# EAGLE board Bubbler (EAGLE 6.4)
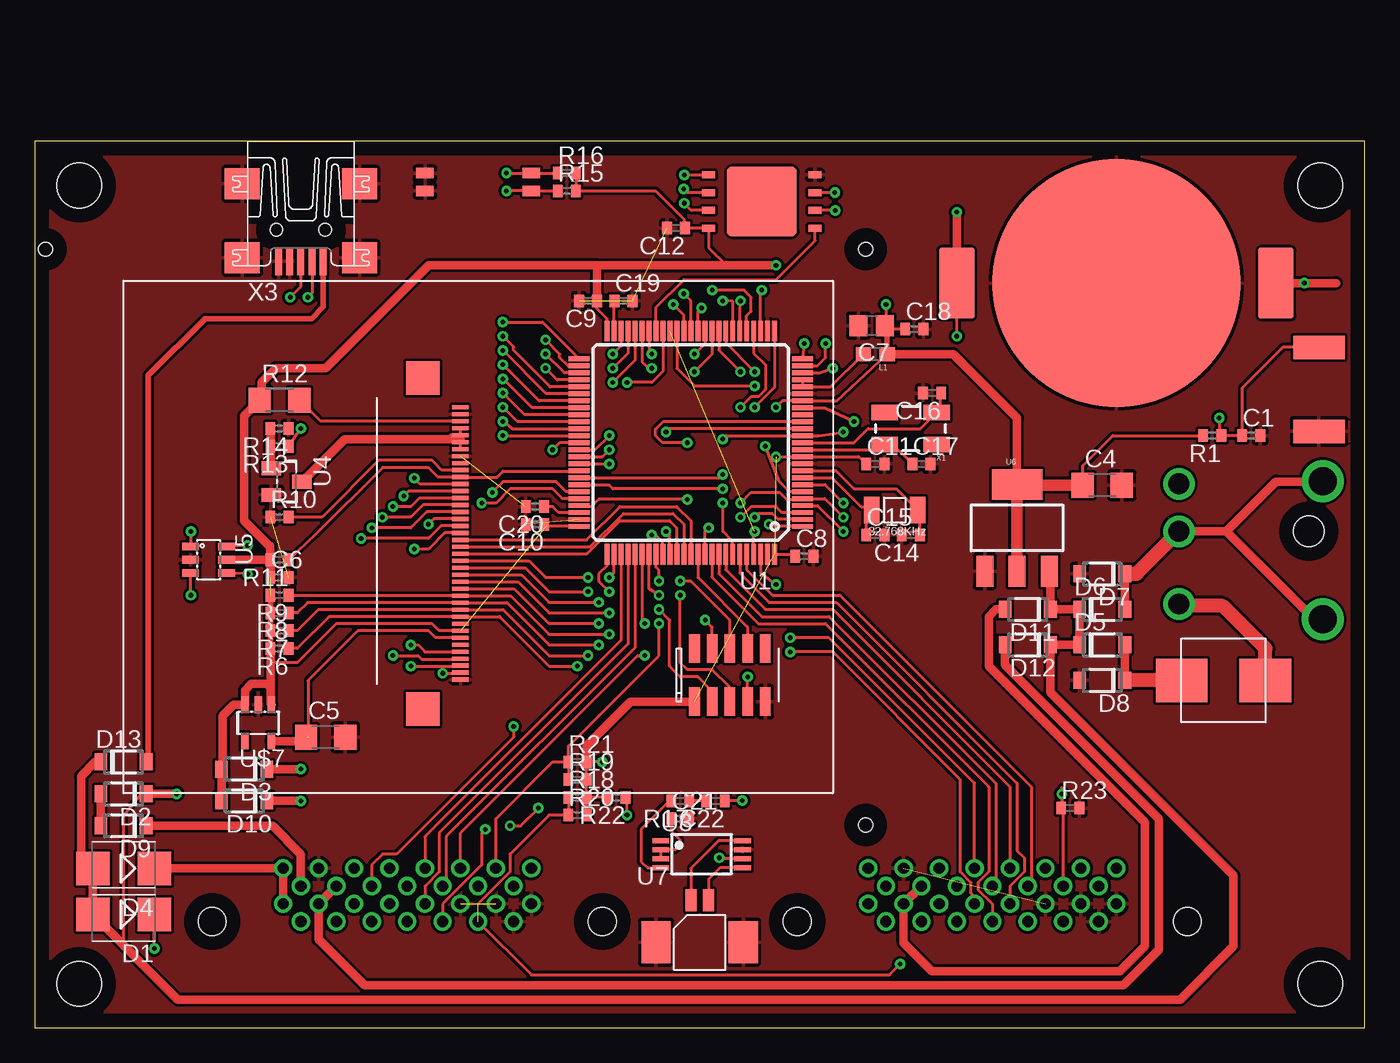
[diagram p0: board, top side]
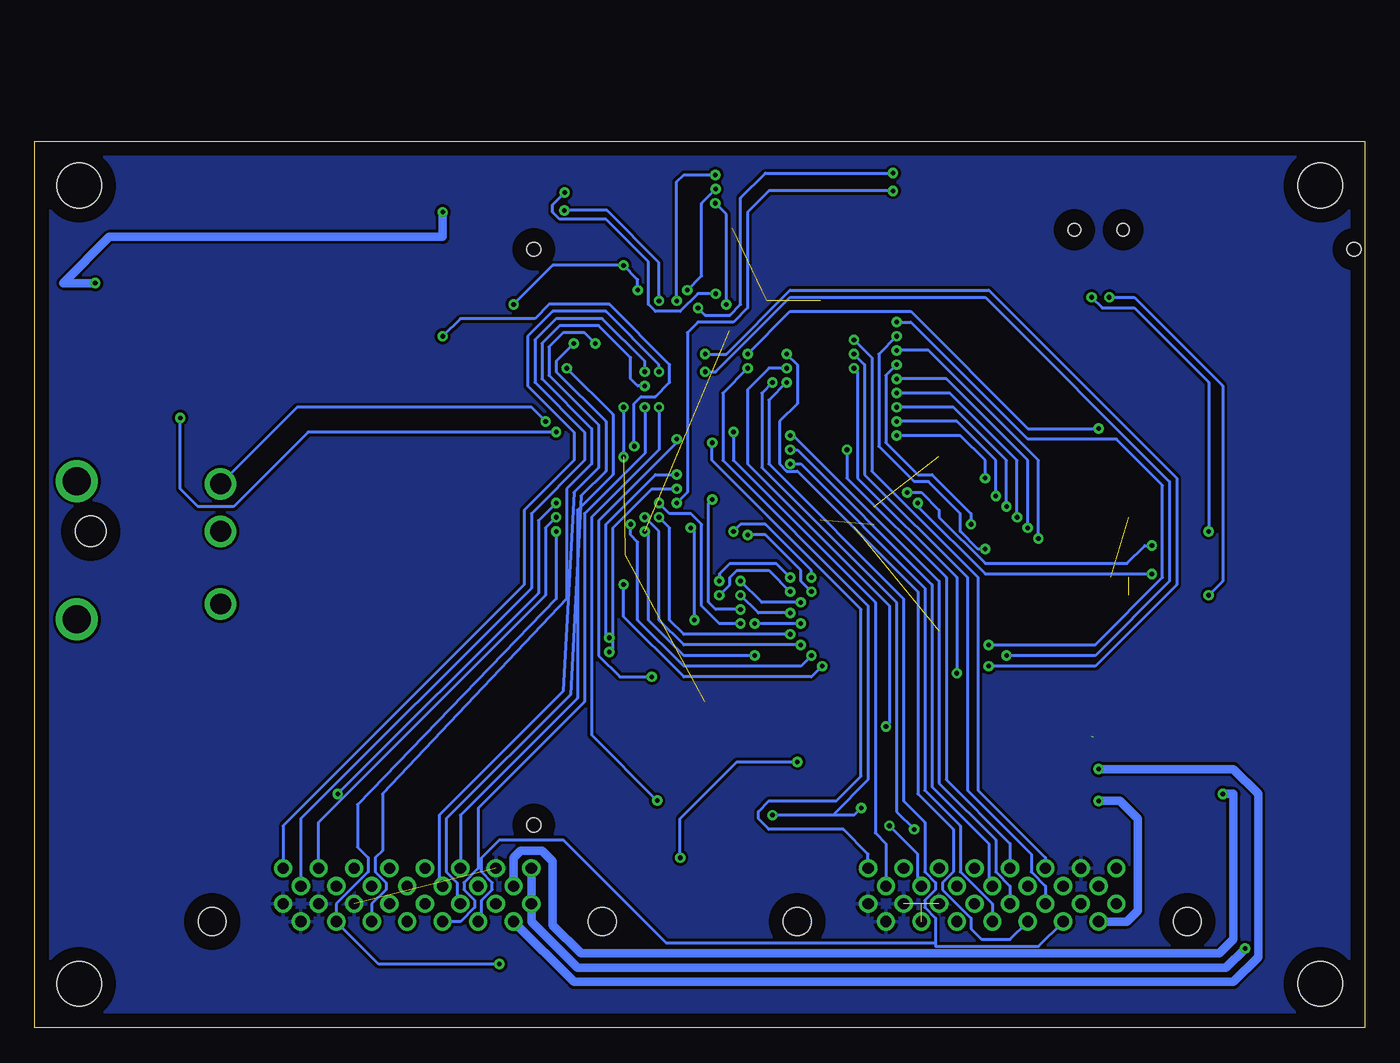
[diagram p1: board, bottom side, seen from below]

Size 95.25 x 63.5 mm. Coordinates in mm from the lower left corner, seen from the top.
Outline: 0,0 95.25,0 95.25,63.5 0,63.5 0,0
Copper layers (1*16): Top 0.035mm / dielectric 1.5mm / Bottom 0.035mm
Design rules "default": minimum track width 10mil, minimum drill 24mil, track to track 8mil, track to pad 8mil, pad to pad 8mil, via to via 8mil, smd to smd 8mil, copper to edge 40mil, drill to drill 8mil, minimum pad ring 10mil, minimum via ring 8mil, stop-mask expansion 4mil, vias tented up to drill 0mil, thermal gap 10mil
Holes 3.2 mm at 3.17,60.33 92.08,60.33 92.08,3.17 3.17,3.17

## Footprints (pad centres in the part's own frame; a part is rotated, then mirrored left to right if it is on the bottom)
BATTERY-LINX-HLD-001 = smd 2.54 x 5.08: P1 -11.43,0; P2 11.43,0 | smd 17.78 x 17.78: PAD 0,0
C0402 = smd 0.7 x 0.9: 1 -0.65,0; 2 0.65,0
C1206 = smd 1.6 x 1.8: 1 -1.4,0; 2 1.4,0
C0805 = smd 1.3 x 1.5: 1 -0.95,0; 2 0.95,0
CONNECTOR-JAE-TX24-30 = drill 0.8: P1 -8.89,3.81; P2 -8.89,1.27; P3 -7.62,2.54; P4 -7.62,0; P5 -6.35,3.81; P6 -6.35,1.27; P7 -5.08,2.54; P8 -5.08,0; P9 -3.81,3.81; P10 -3.81,1.27; P11 -2.54,2.54; P12 -2.54,0; P13 -1.27,3.81; P14 -1.27,1.27; P15 0,2.54; P16 0,0; P17 1.27,3.81; P18 1.27,1.27; P19 2.54,2.54; P20 2.54,0; P21 3.81,3.81; P22 3.81,1.27; P23 5.08,2.54; P24 5.08,0; P25 6.35,3.81; P26 6.35,1.27; P27 7.62,2.54; P28 7.62,0; P29 8.89,3.81; P30 8.89,1.27 | hole 2: -13.97,0; 13.97,0
SMB = smd 2.4 x 2.4: A 2.2,0; C -2.2,0
SOD123FL = smd 0.91 x 1.22: A 1.625,0; C -1.625,0
MF-SM030 = smd 3.7 x 3.1: P$1 0,0; P$2 6,0
0603 = smd 1.1 x 1: 1 -0.85,0; 2 0.85,0
R0402 = smd 0.7 x 0.9: 1 -0.65,0; 2 0.65,0
R1206 = smd 1.6 x 1.803: 1 -1.422,0; 2 1.422,0
SWITCH-DIP-GDH-02 = smd 0.762 x 1.27: P1 0,0; P2 1.27,0; P3 1.27,7.62; P4 0,7.62
ITT-KSS-G = smd 1.7 x 3.7: P$1 -3,2; P$2 3,2
TQFP100 = smd 1.5 x 0.35: 1 -8,6; 2 -8,5.5; 3 -8,5; 4 -8,4.5; 5 -8,4; 6 -8,3.5; 7 -8,3; 8 -8,2.5; 9 -8,2; 10 -8,1.5; 11 -8,1; 12 -8,0.5; 13 -8,0; 14 -8,-0.5; 15 -8,-1; 16 -8,-1.5; 17 -8,-2; 18 -8,-2.5; 19 -8,-3; 20 -8,-3.5; 21 -8,-4; 22 -8,-4.5; 23 -8,-5; 24 -8,-5.5; 25 -8,-6; 51 8,-6; 52 8,-5.5; 53 8,-5; 54 8,-4.5; 55 8,-4; 56 8,-3.5; 57 8,-3; 58 8,-2.5; 59 8,-2; 60 8,-1.5; 61 8,-1; 62 8,-0.5; 63 8,0; 64 8,0.5; 65 8,1; 66 8,1.5; 67 8,2; 68 8,2.5; 69 8,3; 70 8,3.5; 71 8,4; 72 8,4.5; 73 8,5; 74 8,5.5; 75 8,6 | smd 0.35 x 1.5: 26 -6,-8; 27 -5.5,-8; 28 -5,-8; 29 -4.5,-8; 30 -4,-8; 31 -3.5,-8; 32 -3,-8; 33 -2.5,-8; 34 -2,-8; 35 -1.5,-8; 36 -1,-8; 37 -0.5,-8; 38 0,-8; 39 0.5,-8; 40 1,-8; 41 1.5,-8; 42 2,-8; 43 2.5,-8; 44 3,-8; 45 3.5,-8; 46 4,-8; 47 4.5,-8; 48 5,-8; 49 5.5,-8; 50 6,-8; 76 6,8; 77 5.5,8; 78 5,8; 79 4.5,8; 80 4,8; 81 3.5,8; 82 3,8; 83 2.5,8; 84 2,8; 85 1.5,8; 86 1,8; 87 0.5,8; 88 0,8; 89 -0.5,8; 90 -1,8; 91 -1.5,8; 92 -2,8; 93 -2.5,8; 94 -3,8; 95 -3.5,8; 96 -4,8; 97 -4.5,8; 98 -5,8; 99 -5.5,8; 100 -6,8
SPANSION-WSON-8 = smd 0.5 x 1: P1 -1.905,-3.81; P2 -0.635,-3.81; P3 0.635,-3.81; P4 1.905,-3.81; P5 1.905,3.81; P6 0.635,3.81; P7 -0.635,3.81; P8 -1.905,3.81 | smd 5 x 5: P$9 0,0
TSSOP8 = smd 1.2 x 0.35: 1 -2.925,0.975; 2 -2.925,0.325; 3 -2.925,-0.325; 4 -2.925,-0.975; 5 2.925,-0.975; 6 2.925,-0.325; 7 2.925,0.325; 8 2.925,0.975
DUBLIB_SOT23 = smd 1 x 1.4: 1 -0.95,-1.1; 2 0.95,-1.1; 3 0,1.1
SOT23-6L = smd 0.55 x 1.2: 1 -0.95,-1.3; 2 0,-1.3; 3 0.95,-1.3; 4 0.95,1.3; 5 0,1.3; 6 -0.95,1.3
SOT223 = smd 1.219 x 2.235: 1 -2.311,-3.099; 2 0,-3.099; 3 2.311,-3.099 | smd 3.6 x 2.2: 4 0,3.099
MOLEX-1.25WTB-RA-CONN = smd 0.8 x 1.6: P$1 0,0; P$2 1.25,0 | smd 2.1 x 3: P$3 -2.5,-3; P$4 3.75,-3
STM32-JTAG-10P = smd 0.762 x 2.032: 1 0,0; 2 0,3.81; 3 1.27,0; 4 1.27,3.81; 5 2.54,0; 6 2.54,3.81; 7 3.81,0; 8 3.81,3.81; 9 5.08,0; 10 5.08,3.81
DCJACK_CUI_PJ012B = drill 2: GND1 3,6.3; GND2 3,-3.6 | drill 1.5: P1 13.3,5.2; P2 13.3,0; P3 13.3,-3.4 | hole 2.2: 4,0
NHD-2.4-240320SF-OUTLINE = hole 1: 0.75,59.51; 41.97,59.51; 0.75,0.75
SOT23-5L = smd 0.55 x 1.2: 1 -0.95,-1.3; 2 0,-1.3; 3 0.95,-1.3; 4 0.95,1.3; 5 -0.95,1.3
MOLEX-534132-060 = smd 0.3 x 1.2: P1 0,0; P2 0.5,0; P3 1,0; P4 1.5,0; P5 2,0; P6 2.5,0; P7 3,0; P8 3.5,0; P9 4,0; P10 4.5,0; P11 5,0; P12 5.5,0; P13 6,0; P14 6.5,0; P15 7,0; P16 7.5,0; P17 8,0; P18 8.5,0; P19 9,0; P20 9.5,0; P21 10,0; P22 10.5,0; P23 11,0; P24 11.5,0; P25 12,0; P26 12.5,0; P27 13,0; P28 13.5,0; P29 14,0; P30 14.5,0; P31 15,0; P32 15.5,0; P33 16,0; P34 16.5,0; P35 17,0; P36 17.5,0; P37 18,0; P38 18.5,0; P39 19,0; P40 19.5,0 | smd 2.4 x 2.4: P$42 -2.1,-2.7; P$43 21.6,-2.7
CRYSTAL-SMD-5X3 = smd 1.9 x 1.1: 1 -1.85,-1.15; 2 1.85,-1.15; 3 1.85,1.15; 4 -1.85,1.15
CM415 = smd 1.1 x 1.9: P$1 0,0; P$2 3.3,0
DUBLIB_UX60-MB-5ST = smd 2 x 0.5: 1 2.25,1.6; 2 2.25,0.8; 3 2.25,0; 4 2.25,-0.8; 5 2.25,-1.6 | smd 2.2 x 2.5: M1 -3.3,-4.2; M2 -3.3,4.2; M3 2,4.2; M4 2,-4.2 | hole 0.9: 0,-1.75; 0,1.75

## Placement (x,y rotation side)
B1  BATTERY-LINX-HLD-001  [BATTERY-LINX-HLD-001]  77.47,53.34 180 top
C1  220pF  [C0402]  87.12,42.42 0 top
C4  10uF  [C1206]  76.45,38.86 0 top
C5  10uF  [C1206]  20.83,20.83 0 top
C6  0.1uF  [C0402]  17.53,32.26 0 top
C7  10uF  [C0805]  59.94,50.29 180 top
C8  0.1uF  [C0402]  55.12,33.78 0 top
C9  0.1uF  [C0402]  39.62,52.07 180 top
C10  0.1uF  [C0402]  35.81,36.07 180 top
C11  0.1uF  [C0402]  60.2,40.39 0 top
C12  0.1uF  [C0402]  45.92,57.28 180 top
C14  18pF  [C0402]  62.74,35.31 180 top
C15  18pF  [C0402]  60.2,35.31 0 top
C16  18pF  [C0402]  64.26,45.47 180 top
C17  18pf  [C0402]  63.5,40.39 0 top
C18  0.1uF  [C0402]  62.99,50.04 0 top
C19  0.1uF  [C0402]  42.16,52.07 0 top
C20  0.1uF  [C0402]  35.81,37.34 180 top
C21  1uF  [C0402]  46.23,14.99 0 top
C22  0.39uF  [C0402]  48.77,16.26 180 top
CARD0  CONNECTOR-JAE-TX24-30F  [CONNECTOR-JAE-TX24-30]  68.58,7.62 0 top
CARD1  CONNECTOR-JAE-TX24-30F  [CONNECTOR-JAE-TX24-30]  26.67,7.62 0 top
D1  [SMB]  6.35,8.13 180 top
D2  SMF5.0AT1  [SOD123FL]  6.35,16.76 180 top
D3  SMF5.0AT1  [SOD123FL]  14.99,18.54 180 top
D4  [SMB]  6.35,11.43 180 top
D5  SMF5.0AT1  [SOD123FL]  76.45,27.43 0 top
D6  SMF5.0AT1  [SOD123FL]  76.45,29.97 0 top
D7  SMF5.0AT1  [SOD123FL]  76.45,32.51 180 top
D8  SMF5.0AT1  [SOD123FL]  76.45,24.89 180 top
D9  SMF5.0AT1  [SOD123FL]  6.35,14.48 180 top
D10  SMF5.0AT1  [SOD123FL]  14.99,16.26 180 top
D11  SMF5.0AT1  [SOD123FL]  71.12,29.97 180 top
D12  SMF5.0AT1  [SOD123FL]  71.12,27.43 180 top
D13  SMF5.0AT1  [SOD123FL]  6.35,19.05 0 top
F1  BOURNES-PTC-MF-SMXXXMF-SM030  [MF-SM030]  88.14,24.89 180 top
L1  [0603]  60.2,48.26 180 top
R1  47K  [R0402]  84.33,42.42 180 top
R6  10K  [R0402]  17.53,27.18 180 top
R7  10K  [R0402]  17.53,28.45 180 top
R8  10K  [R0402]  17.53,29.72 180 top
R9  10K  [R0402]  17.53,30.99 180 top
R10  47K  [R0402]  17.53,36.58 0 top
R11  47K  [R0402]  17.53,33.53 180 top
R12  330  [R1206]  17.53,44.96 0 top
R13  1K  [R0402]  17.53,41.66 180 top
R14  47K  [R0402]  17.53,42.93 180 top
R15  47K  [R0402]  38.1,59.94 0 top
R16  47K  [R0402]  38.1,61.21 0 top
R17  20K  [R0402]  46.23,16.26 180 top
R18  10K  [R0402]  38.86,16.51 0 top
R19  10K  [R0402]  38.86,17.78 0 top
R20  10K  [R0402]  38.86,15.24 0 top
R21  10K  [R0402]  38.86,19.05 0 top
R22  47K  [R0402]  41.66,16.51 180 top
R23  47K  [R0402]  74.17,15.75 0 top
SW1  SWITCH-DIP-GDH-02  [SWITCH-DIP-GDH-02]  35.56,59.94 90 top
SW2  ITT-SWITCH-KSS-G  [ITT-KSS-G]  93.98,45.72 90 top
U1  STM32F41X-100P  [TQFP100]  46.99,41.91 180 top
U2  SPANSION-S25FL256  [SPANSION-WSON-8]  52.07,59.18 90 top
U3  LM4890  [TSSOP8]  47.75,12.45 0 top
U4  BIPOLAR-PMBT6428  [DUBLIB_SOT23]  18.03,39.12 270 top
U5  USBLC6-2  [SOT23-6L]  12.45,33.53 270 top
U6  TLV1117  [SOT223]  70.36,35.81 0 top
U7  MOLEX-1.25-WTB-RA-CONN-2POS  [MOLEX-1.25WTB-RA-CONN]  46.99,9.14 0 top
U$1  STM32-JTAG-10P  [STM32-JTAG-10P]  47.24,23.37 0 top
U$2  DCJACK-CUI-PJ051AH  [DCJACK_CUI_PJ012B]  95.25,35.56 180 top
U$3  [NHD-2.4-240320SF-OUTLINE]  0,56.52 270 top
U$7  NCP500  [SOT23-5L]  16,21.84 180 top
U$10  NHD-2.4-240320SF  [MOLEX-534132-060]  30.48,44.45 270 top
X1  [CRYSTAL-SMD-5X3]  62.74,42.93 180 top
X2  CM415  [CM415]  63.25,37.08 180 top
X3  MINI-USBUX60-MB-5ST  [DUBLIB_UX60-MB-5ST]  19.05,57.15 270 top

## Library data of the parts
B1 CARD0 CARD1 F1 SW1 SW2 U1-U7 U$1-U$3 U$7 U$10 X2 X3 = Pygmy
C1 C4-C12 C14-C22 R1 R6-R23 = rcl
D1-D13 = diode
L1 = SparkFun-Passives
X1 = SparkFun-FreqCtrl

## Nets
2.8V: C5.1 U$7.5 U$10.P34
3.3V: C4.1 C6.1 C7.1 C8.1 C9.1 C10.1 C11.1 C12.1 C18.1 D3.A D10.A L1.1 R1.2 R6.2 R7.2 R8.2 R9.2 R11.2 R12.1 R15.2 R16.2 R18.2 R19.2 R20.2 R21.2 R22.2 U1.11 U1.19 U1.28 U1.50 U1.75 U1.100 U2.P8 U3.6 U5.5 U6.2 U6.4 U$1.1 U$7.1 U$7.3 U$10.P33
+5V: D2.A D9.A
AUDIO_OUT: C22.1 U1.29
AUDIO_SHUTDOWN: U3.1
BAT: B1.P1 B1.P2 U1.6
BOOT0: R15.1 SW1.P1 U1.94
BOOT1: R16.1 SW1.P2 U1.37
CARD0_INSERT: CARD0.P23 R23.1 U1.7
CARD1_INSERT: CARD1.P23 R22.1 U1.45
CARD_SCL: CARD0.P24 CARD1.P24 R18.1 R20.1 U1.4
CARD_SDA: CARD0.P25 CARD1.P25 R19.1 R21.1 U1.5
EXT0_0: CARD0.P9 U1.23
EXT0_1: CARD0.P10 U1.24
EXT0_2: CARD0.P11 U1.25
EXT0_3: CARD0.P12 U1.26
EXT0_4: CARD0.P13 U1.68
EXT0_5: CARD0.P14 U1.69
EXT0_6: CARD0.P15 U1.92
EXT0_7: CARD0.P16 U1.91
EXT0_8: CARD0.P17 U1.93
EXT0_9: CARD0.P18 U1.95
EXT0_10: CARD0.P19 U1.96
EXT0_11: CARD0.P20 U1.40
EXT0_12: CARD0.P21
EXT0_ADC0: CARD0.P27 U1.33
EXT0_ADC1: CARD0.P29 U1.34
EXT1_0: CARD1.P9 U1.52
EXT1_1: CARD1.P10 U1.53
EXT1_2: CARD1.P11 U1.47
EXT1_3: CARD1.P12 U1.48
EXT1_4: CARD1.P13 U1.63
EXT1_5: CARD1.P14 U1.64
EXT1_6: CARD1.P15 U1.65
EXT1_7: CARD1.P16 U1.66
EXT1_8: CARD1.P17 U1.78
EXT1_9: CARD1.P18 U1.79
EXT1_10: CARD1.P19 U1.80
EXT1_11: CARD1.P20 U1.42
EXT1_12: CARD1.P21 U1.41 U1.97
EXT1_ADC0: CARD1.P27 U1.15
EXT1_ADC1: CARD1.P29 U1.16
FLASH_CS: U1.43 U2.P1
FLASH_IO0: U1.32 U2.P5
FLASH_IO1: U1.31 U2.P2
FLASH_IO2: U1.38 U2.P3
FLASH_IO3: U1.39 U2.P7
FLASH_SCK: U1.30 U2.P6
GND: B1.PAD C1.2 C4.2 C5.2 C6.2 C7.2 C8.2 C9.2 C10.2 C11.2 C12.2 C14.2 C15.2 C16.2 C17.2 C18.2 C19.2 C20.2 C21.2 CARD0.P5 CARD0.P22 CARD0.P26 CARD0.P28 CARD0.P30 CARD1.P5 CARD1.P22 CARD1.P26 CARD1.P28 CARD1.P30 D7.A D8.A R10.1 R14.1 R23.2 SW1.P3 SW1.P4 SW2.P$1 U1.10 U1.20 U1.27 U1.74 U1.99 U2.P4 U3.7 U4.2 U5.2 U6.1 U7.P$3 U7.P$4 U$1.9 U$7.2 U$10.P2 U$10.P8 U$10.P40 X3.4 X3.5 X3.M1 X3.M2 X3.M3 X3.M4
JTCK: U1.76 U$1.5
JTDI: U1.77 U$1.6
JTDO: U1.89 U$1.8
JTMS: U1.72 U$1.3
LCD_BL: R13.1 U1.44
LCD_CS: R6.1 U1.98 U$10.P31
LCD_DB0: U1.81 U$10.P27
LCD_DB1: U1.82 U$10.P26
LCD_DB2: U1.83 U$10.P25
LCD_DB3: U1.84 U$10.P24
LCD_DB4: U1.85 U$10.P23
LCD_DB5: U1.86 U$10.P22
LCD_DB6: U1.87 U$10.P21
LCD_DB7: U1.88 U$10.P20
LCD_DB8: U1.55 U$10.P19
LCD_DB9: U1.56 U$10.P18
LCD_DB10: U1.57 U$10.P17
LCD_DB11: U1.58 U$10.P16
LCD_DB12: U1.59 U$10.P15
LCD_DB13: U1.60 U$10.P14
LCD_DB14: U1.61 U$10.P13
LCD_DB15: U1.62 U$10.P12
LCD_RD: R9.1 U1.3 U$10.P28
LCD_RESET: R11.1 U1.67 U$10.P11
LCD_RS: R7.1 U1.1 U$10.P30
LCD_WR: R8.1 U1.2 U$10.P29
LCD_X+: U1.36 U$10.P38
LCD_X-: U1.51 U$10.P36
LCD_Y+: U1.35 U$10.P37
LCD_Y-: U1.54 U$10.P39
N$1: CARD1.P4 D10.C
N$2: D6.A D7.C U$2.GND1 U$2.GND2 U$2.P2
N$3: F1.P$1 U$2.P1
N$4: R10.2 U$10.P10
N$5: U5.1 X3.2
N$6: U5.3 X3.3
N$7: D5.A D8.C F1.P$2
N$8: R12.2 U$10.P3
N$9: CARD0.P4 D3.C
N$10: U4.3 U$10.P4 U$10.P5 U$10.P6 U$10.P7
N$11: L1.2 U1.21 U1.22
N$12: C19.1 U1.49
N$13: R13.2 R14.2 U4.1
N$14: C20.1 U1.73
N$15: CARD0.P1 CARD0.P2 D1.C
N$16: U3.5 U7.P$2
N$17: U3.8 U7.P$1
N$18: C21.1 U3.2 U3.3
N$19: R17.2 U3.4
N$20: C22.2 R17.1
N$21: CARD1.P1 CARD1.P2 D4.C
N$22: CARD0.P3 D2.C
N$24: CARD0.P6 CARD0.P7 D11.A
N$25: CARD1.P3 D9.C
N$26: D13.A X3.1
N$28: CARD1.P6 CARD1.P7 D12.A
NJTRST: U1.90 U$1.4
NRST: C1.1 R1.1 SW2.P$2 U1.14 U$1.7
OSC32_IN: C15.1 U1.8 X2.P$2
OSC32_OUT: C14.1 U1.9 X2.P$1
OSC_IN: C17.1 U1.12 X1.3
OSC_OUT: C16.1 U1.13 X1.1
PWR_BAT: CARD0.P8 CARD1.P8 U1.46
PWR_CHG: U1.18 U$2.P3
USB_DM: U1.70 U5.6
USB_DP: U1.71 U5.4
VIN: D1.A D4.A D5.C D6.C D11.C D12.C D13.C U6.3

## Tracks (layer width: path | path; a pad name or v marks a point on that pad's centre or on a via)
2.8V  (1 unrouted)
  Top 0.203: U$10.P34 28.69,27.95 28.19,28.45 23.12,28.46 19.56,24.89 19.56,20.86
  Top 0.61: 19.24,20.89 C5.1 19.14,20.54 U$7.5
3.3V  (via drill 0.33)  (4 unrouted)
  Top 0.203: U$10.P33 28.95,28.45 28.45,28.96 21.59,28.96 18.8,26.16 16.88,26.16 | R16.2 R15.2 44.45,59.94 46.48,57.91 46.48,57.37 C12.1 U2.P8 48.26,55.88 49.53,54.61 | U1.50 40.99,50.78 40.28,51.49 40.28,52.06 C9.1 | 60.85,48.06 L1.1 57.44,44.91 U1.19 53.55,44.91 v53.09,44.45 | U1.75 36.62,35.91 C10.1 | R18.2 R19.2 R21.2 v40.64,19.05 | R20.2 R18.2 | R22.2 R18.2 | U3.6 49.09,12.12 v49.02,12.19 | C11.1 59.02,40.91 U1.11 54.97,40.89 v53.09,40.89 | U1.100 54.34,33.91 C8.1 | v60.96,51.82 60.96,50.36 C7.1 61.15,50.04 C18.1 | U1.28 51.99,52.75 v52.07,52.83 | C4.1 75.05,40.26 77.22,42.42 R1.2
  Top 0.406: R7.2 R6.2 R8.2 R9.2 | L1.1 61.05,50.14 C7.1
  Top 0.61: R6.2 16.88,26.16 16.88,24.38 | 16.88,24.38 16.88,23.22 U$7.1 | 16.88,24.38 16.62,24.64 15.49,24.64 15.05,24.2 U$7.3 14.25,23.14 13.46,22.35 13.46,18.64 D3.A D10.A | U5.5 R11.2 C6.1 16.87,34.53 16.77,34.53 14.99,36.32 14.99,43.84 R12.1 16.26,45.11 16.26,46.23 17.27,47.24 20.83,47.24 28.19,54.61 40.39,54.61 | U6.4 70.36,43.69 65.79,48.26 L1.1 | R21.2 39.51,20.21 42.67,23.37 U$1.1 | 40.28,52.06 40.28,54.51 40.39,54.61 | 40.39,54.61 49.53,54.61 v53.09,54.61
  Top 0.813: U6.2 U6.4 70.41,38.86 C4.1
  Bottom 0.203: v49.02,12.19 49.02,14.99 44.96,19.05 v40.64,19.05 | v60.96,51.82 58.17,54.61 v53.09,54.61 52.07,53.59 v52.07,52.83 | v53.09,44.45 v53.09,40.89
+5V
  Top 0.61: D9.A D2.A
AUDIO_OUT  (via drill 0.33)
  Top 0.203: U1.29 51.49,48.33 52.32,47.5 52.32,45.72 51.82,45.21 51.31,45.21 v50.55,44.45 | v50.67,16.28 49.4,16.27 C22.1
  Bottom 0.203: v50.55,44.45 50.55,41.4 55.37,36.58 55.37,20.98 v50.67,16.28
BAT  (via drill 0.33)
  Top 0.203: U1.6 54.05,38.41 53.34,39.12 v52.32,41.66 | v66.04,49.53 B1.P2
  Top 0.61: B1.P2 v66.04,58.42 | 93.22,53.34 v90.93,53.34 B1.P1
  Bottom 0.203: v52.32,41.66 52.32,44.7 51.82,45.21 50.8,45.21 49.78,46.23 49.78,47.5 54.1,51.82 58.42,51.82 59.44,50.8 64.77,50.8 v66.04,49.53
  Bottom 0.61: v66.04,58.42 66.04,56.64 89.92,56.64 93.22,53.34 v90.93,53.34
BOOT0  (via drill 0.33)
  Top 0.203: v33.78,59.94 SW1.P1 R15.1 | U1.94 49.99,34.85 49.28,35.56 v49.28,37.59
  Bottom 0.203: v33.78,59.94 42.67,59.94 44.2,58.42 44.2,51.56 45.21,50.55 47.75,50.55 48.51,49.78 48.51,38.35 v49.28,37.59
BOOT1  (via drill 0.33)
  Top 0.203: U1.37 47.49,51.3 v47.75,51.56 | v33.78,61.21 SW1.P2 R16.1
  Bottom 0.203: v47.75,51.56 47.24,51.05 45.47,51.05 44.7,51.82 44.7,59.44 42.93,61.21 v33.78,61.21
CARD0_INSERT  (via drill 0.33)
  Top 0.203: CARD0.P23 73.66,15.35 R23.1 | 73.56,17.22 v73.56,16.76 | v73.56,16.76 73.56,15.53 R23.1 | U1.7 56.59,38.91 v57.91,37.59 | v73.56,16.76 73.56,15.79 R23.1
  Bottom 0.203: v57.91,37.59 59.18,36.32 59.18,31.14 v73.56,16.76
CARD1_INSERT  (via drill 0.33)
  Top 0.203: U1.45 43.49,47.7 43.94,47.24 v44.2,47.24 | v42.42,15.24 42.42,16.4 R22.1 | v34.04,14.48 34.8,14.48 v36.07,15.75
  Bottom 0.203: v44.2,47.24 45.97,45.47 45.97,40.64 35.56,30.23 35.56,17.78 38.1,15.24 | 38.1,15.24 v42.42,15.24 | CARD1.P23 32,10.41 32,12.45 v34.04,14.48 | v36.07,15.75 36.58,15.24 38.1,15.24
CARD_SCL  (via drill 0.33)  (1 unrouted)
  Top 0.203: 31.75,8.89 34.04,11.18 34.04,12.45 36.83,15.24 R20.1 R18.1 | CARD1.P24 35.56,3.81 61.21,3.81 v61.98,4.57 | U1.4 56.06,37.41 v57.91,35.56
  Bottom 0.203: v61.98,4.57 70.61,4.57 CARD0.P24 73.66,8.89 71.37,11.18 71.37,12.19 72.14,12.95 72.14,16 57.91,30.73 v57.91,35.56
CARD_SDA  (via drill 0.33)
  Top 0.203: CARD1.P25 33.02,14.99 37.08,19.05 R21.1 | R21.1 R19.1 | R21.1 38.21,20.18 44.7,26.67 v44.7,28.96 | v50.55,37.59 51.31,38.35 53.34,38.35 53.85,37.85 54.93,37.85 U1.5 56.58,37.91 v57.91,36.58
  Bottom 0.203: CARD0.P25 74.93,14.73 58.67,30.99 58.67,35.81 v57.91,36.58 | v44.7,28.96 46.23,28.96 47.5,30.23 47.5,36.07 48.26,36.83 49.78,36.83 v50.55,37.59
EXT0_0  (via drill 0.33)
  Top 0.203: U1.23 56.21,46.91 v57.15,47.24
  Bottom 0.203: v57.15,47.24 53.85,43.94 53.85,39.62 56.39,37.08 56.39,23.62 64.77,15.24 CARD0.P9
EXT0_1  (via drill 0.33)
  Top 0.203: U1.24 56.05,47.41 56.64,48.01 v56.64,49.02
  Bottom 0.203: v56.64,49.02 57.91,47.75 57.91,46.99 54.36,43.43 54.36,39.88 56.13,38.1 56.9,23.88 65.79,14.99 65.79,11.18 65.02,10.41 65.02,9.14 CARD0.P10
EXT0_2  (via drill 0.33)
  Top 0.203: U1.25 55.02,47.91 v55.12,49.02
  Bottom 0.203: v55.12,49.02 55.88,49.78 57.4,49.78 58.42,48.77 58.42,46.74 54.86,43.18 54.86,40.13 56.64,38.35 57.4,24.13 66.29,15.24 66.29,10.41 CARD0.P11
EXT0_3  (via drill 0.33)
  Top 0.203: U1.26 52.99,45.88 v51.56,44.45
  Bottom 0.203: v51.56,44.45 51.56,41.15 55.88,36.83 55.88,23.37 63.5,15.75 63.5,11.43 64.52,10.41 64.52,9.91 63.75,9.14 63.75,8.64 64.77,7.62 CARD0.P12
EXT0_4  (via drill 0.33)
  Top 0.203: CARD0.P13 67.31,17.53 56.9,27.94 v54.1,27.94 | v49.28,39.62 49.02,39.37 39.03,39.37 U1.68
  Bottom 0.203: v54.1,27.94 54.36,28.19 54.36,36.07 50.8,39.62 v49.28,39.62
EXT0_5  (via drill 0.33)
  Top 0.203: CARD0.P14 67.31,9.4 67.06,9.65 67.06,10.41 66.29,11.18 66.29,17.78 57.15,26.92 v54.1,26.92 | v49.28,38.61 41.4,38.61 41.15,38.86 39.04,38.86 U1.69
  Bottom 0.203: v49.28,38.61 51.05,38.61 53.85,35.81 53.85,27.18 v54.1,26.92
EXT0_6
  Top 0.203: U1.92 48.99,32.54 52.07,29.46 56.9,29.46 68.83,17.53 68.83,10.41 CARD0.P15
EXT0_7
  Top 0.203: U1.91 48.49,32.28 51.82,28.96 56.64,28.96 68.33,17.27 68.33,11.18 67.56,10.41 67.56,9.91 68.58,8.89 CARD0.P16
EXT0_8
  Top 0.203: U1.93 49.49,32.81 52.32,29.97 57.15,29.97 69.85,17.27 CARD0.P17
EXT0_9
  Top 0.203: U1.95 50.49,32.57 52.58,30.48 57.4,30.48 70.36,17.53 70.36,12.7 70.87,12.19 70.87,11.18 69.85,10.16 CARD0.P18
EXT0_10
  Top 0.203: U1.96 50.99,32.83 52.83,30.99 57.66,30.99 71.37,17.27 71.37,10.41 CARD0.P19
EXT0_11  (via drill 0.33)
  Top 0.203: U1.40 45.99,47.23 47.24,45.97 v51.56,45.97
  Bottom 0.203: v51.56,45.97 52.07,45.97 52.58,46.48 52.58,48.01 54.86,50.29 57.66,50.29 58.93,49.02 58.93,46.48 55.37,42.93 55.37,40.39 57.15,38.61 57.15,30.73 70.36,16.76 70.36,12.7 70.87,12.19 70.87,11.18 70.1,10.41 70.1,9.91 71.12,8.89 CARD0.P20
EXT0_ADC0  (via drill 0.33)
  Top 0.203: U1.33 49.49,49.06 v51.56,46.99
  Bottom 0.203: v51.56,46.99 51.56,47.75 54.61,50.8 57.91,50.8 59.44,49.28 59.44,46.23 55.88,42.67 55.88,40.64 59.69,36.83 59.69,31.5 76.2,14.99 CARD0.P27
EXT0_ADC1  (via drill 0.33)
  Top 0.203: U1.34 48.99,48.55 v50.55,46.99
  Bottom 0.203: v50.55,46.99 50.55,47.5 54.36,51.31 58.17,51.31 59.94,49.53 59.94,45.97 56.64,42.67 56.64,40.64 60.2,37.08 60.2,31.75 77.47,14.48 CARD0.P29
EXT1_0  (via drill 0.33)
  Top 0.203: U1.52 38.19,47.41 37.59,48.01 37.59,48.26 v36.58,49.28
  Bottom 0.203: v36.58,49.28 35.31,48.01 35.31,39.88 27.69,32.26 27.69,17.02 22.86,12.19 CARD1.P9
EXT1_1  (via drill 0.33)
  Top 0.203: U1.53 37.93,46.91 v36.58,48.26
  Bottom 0.203: v36.58,48.26 35.81,47.5 35.81,39.62 28.45,32.26 28.45,17.02 23.88,12.45 23.88,11.18 22.86,10.16 CARD1.P10
EXT1_2  (via drill 0.33)
  Top 0.203: U1.47 42.49,48.33 v41.4,47.24 | v34.29,21.59 34.29,20.83 25.91,12.45 24.89,12.45 24.13,11.68 CARD1.P11
  Bottom 0.203: v41.4,47.24 42.67,47.24 44.2,45.72 44.2,40.39 34.04,30.23 34.04,21.84 v34.29,21.59
EXT1_3  (via drill 0.33)
  Top 0.203: U1.48 41.99,48.85 v41.4,48.26
  Bottom 0.203: v41.4,48.26 40.64,47.5 40.64,44.7 41.91,43.43 41.91,40.39 41.4,39.88 40.64,39.88 32,31.24 32,16.76 29.46,14.22 29.46,11.18 30.23,10.41 30.23,9.91 28.19,7.87 28.19,7.11 27.43,6.35 25.4,6.35 CARD1.P12
EXT1_4  (via drill 0.33)
  Top 0.203: U1.63 37.59,41.91 v37.08,41.4
  Bottom 0.203: v37.08,41.4 37.08,39.37 29.97,32.26 29.97,17.78 25.4,13.21 CARD1.P13
EXT1_5  (via drill 0.33)
  Top 0.203: U1.64 40.14,41.41 v41.15,42.42
  Bottom 0.203: v41.15,42.42 40.89,42.42 30.48,32 30.48,17.53 26.42,13.46 26.42,11.18 25.4,10.16 CARD1.P14
EXT1_6  (via drill 0.33)
  Top 0.203: U1.65 40.66,40.91 v41.15,41.4
  Bottom 0.203: v41.15,41.4 40.64,41.4 30.99,31.75 30.99,17.27 26.92,13.21 26.92,10.41 CARD1.P15
EXT1_7  (via drill 0.33)
  Top 0.203: U1.66 40.92,40.41 v41.15,40.39
  Bottom 0.203: v41.15,40.39 40.39,40.39 31.5,31.5 31.5,17.02 28.96,14.48 28.96,11.18 26.67,8.89 CARD1.P16
EXT1_8
  Top 0.203: U1.78 41.99,27.77 27.94,13.72 CARD1.P17
EXT1_9
  Top 0.203: U1.79 42.49,27.5 28.96,13.97 28.96,11.18 27.94,10.16 CARD1.P18
EXT1_10
  Top 0.203: U1.80 42.99,27.24 29.46,13.72 29.46,10.41 CARD1.P19
EXT1_11  (via drill 0.33)
  Top 0.203: v42.42,46.23 44.2,46.23 44.99,47.02 U1.42 | v32.26,14.22 32,13.97 32,11.68 29.21,8.89 CARD1.P20
  Bottom 0.203: v42.42,46.23 43.18,45.47 43.18,40.13 33.53,30.48 33.53,15.49 v32.26,14.22
EXT1_12  (via drill 0.33)  (1 unrouted)
  Top 0.203: CARD1.P21 30.48,13.97 43.18,26.67 v43.69,26.67 | U1.97 51.49,35.49 v51.56,35.56
  Bottom 0.203: v43.69,26.67 48.77,26.67 51.31,29.21 51.31,35.31 v51.56,35.56
EXT1_ADC0  (via drill 0.33)
  Top 0.203: U1.15 45.45,42.91 v45.21,42.67
  Bottom 0.203: v45.21,42.67 45.21,40.64 35.05,30.48 35.05,13.97 34.29,13.21 CARD1.P27
EXT1_ADC1  (via drill 0.33)
  Top 0.203: U1.16 44.98,43.41 44.45,42.88 44.45,42.42 44.96,41.91 v46.74,41.91
  Bottom 0.203: CARD1.P29 35.56,12.45 37.34,14.22 42.67,14.22 43.43,14.99 43.43,15.49 42.67,16.26 37.85,16.26 36.07,18.03 36.07,29.97 46.74,40.64 v46.74,41.91
FLASH_CS
  Top 0.203: U1.43 44.49,51.6 46.48,53.59 53.09,53.59 55.88,56.39 U2.P1
FLASH_IO0  (via drill 0.33)
  Top 0.203: U1.32 49.99,52.02 v49.28,52.07 | v46.51,61.09 U2.P5
  Bottom 0.203: v49.28,52.07 49.28,60.58 48.77,61.09 v46.51,61.09
FLASH_IO1  (via drill 0.33)
  Top 0.203: U1.31 50.49,51.25 v50.55,52.07 | v57.33,58.55 U2.P2
  Bottom 0.203: v50.55,52.07 50.55,54.81 54.28,58.55 v57.33,58.55
FLASH_IO2  (via drill 0.33)
  Top 0.203: U1.38 46.99,52.07 v46.48,52.58 | v57.3,59.82 U2.P3
  Bottom 0.203: v46.48,52.58 47.75,52.58 49.02,51.31 50.8,51.31 51.31,51.82 51.31,54.86 54.36,57.91 57.66,57.91 58.17,58.42 58.17,58.95 v57.3,59.82
FLASH_IO3  (via drill 0.33)
  Top 0.203: U1.39 46.49,51.05 v45.72,51.82 | U2.P7 47.02,58.55 v46.51,59.05
  Bottom 0.203: v45.72,51.82 45.72,58.27 v46.51,59.05
FLASH_SCK  (via drill 0.33)
  Top 0.203: U1.30 50.99,50.99 51.31,51.31 51.31,52.32 50.8,52.83 v48.51,52.83 | U2.P6 46.74,59.82 v46.48,60.07
  Bottom 0.203: v48.51,52.83 47.5,53.85 47.5,59.05 v46.48,60.07
GND  (7 unrouted)
  pour Top: 0,63.5 95.25,63.5 95.25,0 0,0
  pour Bottom: 0,63.5 95.25,63.5 95.25,0 0,0
JTCK  (via drill 0.33)
  Top 0.203: U$1.5 49.78,24.38 48.51,25.65 46.74,25.65 46.23,26.16 v46.23,30.99 | U1.76 40.99,33.12 40.39,32.51 40.39,32 v41.15,31.24
  Bottom 0.203: v46.23,30.99 45.47,31.75 45.47,32.26 44.96,32.77 42.67,32.77 v41.15,31.24
JTDI  (via drill 0.33)
  Top 0.203: U$1.6 49.78,29.21 46.99,32 v46.23,32 | v41.15,32.26 41.48,32.59 41.48,33.9 U1.77
  Bottom 0.203: v41.15,32.26 42.16,33.27 45.47,33.27 46.23,32.51 v46.23,32
JTDO
  Top 0.203: U1.89 47.49,32.27 51.05,28.7 U$1.8
JTMS  (via drill 0.33)
  Top 0.203: U$1.3 48.51,24.13 47.5,25.15 46.23,25.15 45.47,25.91 45.47,29.21 v44.7,29.97 | v46.74,37.85 40.39,37.85 39.88,37.34 39.06,37.34 U1.72
  Bottom 0.203: v44.7,29.97 46.48,29.97 46.99,30.48 46.99,37.59 v46.74,37.85
LCD_BL  (via drill 0.33)
  Top 0.203: U1.44 43.99,48.47 v44.2,48.26 | v19.05,42.93 R13.1
  Bottom 0.203: v44.2,48.26 41.15,51.31 32.51,51.31 24.13,42.93 v19.05,42.93
LCD_CS  (via drill 0.33)
  Top 0.203: R6.1 18.8,27.18 21.07,29.45 U$10.P31 33.29,29.45 | 33.29,29.45 33.27,29.46 | 33.29,29.45 36.83,25.91 v38.86,25.91 | v53.09,31.75 51.99,32.59 U1.98
  Bottom 0.203: v38.86,25.91 39.62,25.15 48.77,25.15 53.09,29.46 v53.09,31.75
LCD_DB0  (via drill 0.33)
  Top 0.203: U$10.P27 34.34,31.45 36.83,28.96 v40.39,28.96 | U1.81 43.49,28.9 v43.69,28.96
  Bottom 0.203: v40.39,28.96 v43.69,28.96
LCD_DB1  (via drill 0.33)
  Top 0.203: U$10.P26 34.6,31.95 36.83,29.72 v41.15,29.72 | v44.7,30.99 43.99,31.45 U1.82
  Bottom 0.203: v41.15,29.72 43.43,29.72 v44.7,30.99
LCD_DB2  (via drill 0.33)
  Top 0.203: U$10.P25 34.86,32.45 36.83,30.48 v40.39,30.48 | v44.7,32 44.7,32.79 44.5,32.99 U1.83
  Bottom 0.203: v40.39,30.48 43.18,30.48 v44.7,32
LCD_DB3  (via drill 0.33)
  Top 0.203: U$10.P24 35.12,32.95 36.83,31.24 v39.62,31.24 | U1.84 44.96,33.94 44.96,34.8 44.45,35.31 v44.2,35.31
  Bottom 0.203: v44.2,35.31 42.93,35.31 40.39,32.77 40.39,32 v39.62,31.24
LCD_DB4  (via drill 0.33)
  Top 0.203: U$10.P23 35.38,33.45 36.58,32.26 v39.62,32.26 | U1.85 45.47,33.93 45.47,35.31 v45.21,35.56
  Bottom 0.203: v39.62,32.26 39.62,32.77 42.93,36.07 44.7,36.07 v45.21,35.56
LCD_DB5
  Top 0.203: U$10.P22 39.54,33.95 41.91,36.32 45.47,36.32 45.97,35.81 45.97,33.93 U1.86
LCD_DB6
  Top 0.203: U$10.P21 39.78,34.45 42.16,36.83 45.72,36.83 46.48,36.07 U1.87
LCD_DB7
  Top 0.203: U$10.P20 39.52,34.95 41.91,37.34 45.97,37.34 46.99,36.32 U1.88
LCD_DB8  (via drill 0.33)
  Top 0.203: U1.55 36.89,45.91 34.29,48.51 34.29,48.77 v33.53,49.53 | U$10.P19 29.35,35.45 28.19,34.29 v27.18,34.29
  Bottom 0.203: v33.53,49.53 34.8,48.26 34.8,41.66 32.26,39.12 31.24,39.12 28.96,36.83 28.96,35.56 27.69,34.29 v27.18,34.29
LCD_DB9  (via drill 0.33)
  Top 0.203: v33.53,48.51 36.58,45.47 39.44,45.47 U1.56 | U$10.P18 29.09,35.95 28.19,35.05 v23.37,35.05
  Bottom 0.203: v23.37,35.05 23.37,40.64 31.24,48.51 v33.53,48.51
LCD_DB10  (via drill 0.33)
  Top 0.203: U1.57 36.12,44.91 v33.53,47.5 | U$10.P17 28.57,36.45 v28.19,36.07
  Bottom 0.203: v33.53,47.5 34.29,46.74 34.29,41.91 32,39.62 30.99,39.62 28.19,36.83 v28.19,36.07
LCD_DB11  (via drill 0.33)
  Top 0.203: v33.53,46.48 35.56,44.45 39.03,44.45 U1.58 | U$10.P16 28.06,36.95 26.92,35.81 v24.13,35.81
  Bottom 0.203: v24.13,35.81 24.13,40.64 29.97,46.48 v33.53,46.48
LCD_DB12  (via drill 0.33)
  Top 0.203: U$10.P15 27.8,37.45 26.92,36.58 v24.89,36.58 | v33.53,45.47 35.05,43.94 39.02,43.94 U1.59
  Bottom 0.203: v24.89,36.58 24.89,40.64 29.72,45.47 v33.53,45.47
LCD_DB13  (via drill 0.33)
  Top 0.203: v33.53,44.45 34.54,43.43 39.01,43.43 U1.60 | U$10.P14 27.54,37.95 26.92,37.34 v25.65,37.34
  Bottom 0.203: v25.65,37.34 25.65,40.64 29.46,44.45 v33.53,44.45
LCD_DB14  (via drill 0.33)
  Top 0.203: v33.53,43.43 34.18,42.93 U1.61 | U$10.P13 26.77,38.45 v26.42,38.1
  Bottom 0.203: v26.42,38.1 26.42,40.64 29.21,43.43 v33.53,43.43
LCD_DB15  (via drill 0.33)
  Top 0.203: v33.53,42.42 U1.62 | U$10.P12 27.6,38.95 v27.18,39.37
  Bottom 0.203: v27.18,39.37 27.18,40.64 28.96,42.42 v33.53,42.42
LCD_RD  (via drill 0.33)
  Top 0.203: R9.1 18.21,30.95 U$10.P28 34.07,30.95 36.83,28.19 v41.15,28.19 | U1.3 53.52,36.91 53.09,37.34 51.31,37.34 v50.55,36.58
  Bottom 0.203: v41.15,28.19 48.77,28.19 49.78,29.21 49.78,35.81 v50.55,36.58
LCD_RESET
  Top 0.203: R11.1 20.07,35.31 24.89,40.13 28.19,40.13 28.88,39.45 U$10.P11 33.1,39.45 33.53,39.88 38.96,39.88 U1.67
LCD_RS  (via drill 0.33)
  Top 0.203: R7.1 18.8,28.45 20.3,29.95 U$10.P30 33.55,29.95 36.83,26.67 v39.62,26.67 | U1.1 52.74,35.91 v52.58,36.07
  Bottom 0.203: v39.62,26.67 40.39,25.91 48.77,25.91 52.07,29.21 52.07,34.8 52.58,35.31 v52.58,36.07
LCD_WR  (via drill 0.33)
  Top 0.203: R8.1 18.8,29.72 19.53,30.45 U$10.P29 33.81,30.45 36.83,27.43 v40.39,27.43 | U1.2 55,36.42 53.24,36.42 52.83,36.83 51.82,36.83 v51.56,36.58
  Bottom 0.203: v40.39,27.43 48.77,27.43 50.55,29.21 50.55,35.56 v51.56,36.58
LCD_X+  (via drill 0.33)
  Top 0.203: U1.36 47.99,49.01 v47.24,48.26 | v26.92,25.91 30.44,25.91 U$10.P38
  Bottom 0.203: v47.24,48.26 45.72,48.26 41.15,52.83 26.92,52.83 13.46,39.37 13.46,31.75 19.3,25.91 v26.92,25.91
LCD_X-  (via drill 0.33)
  Top 0.203: 38.45,47.91 U1.51 36.35,50.55 v33.53,50.55 | v26.92,27.43 27.43,27.43 27.94,26.92 30.45,26.92 U$10.P36
  Bottom 0.203: v33.53,50.55 32.51,50.55 24.13,42.16 17.78,42.16 14.48,38.86 14.48,32.26 19.3,27.43 v26.92,27.43
LCD_Y+  (via drill 0.33)
  Top 0.203: U1.35 48.49,48.24 v47.24,46.99 | v25.65,26.67 27.43,26.67 27.69,26.42 30.45,26.42 U$10.P37
  Bottom 0.203: v47.24,46.99 46.48,46.99 41.15,52.32 27.18,52.32 13.97,39.12 13.97,32 19.3,26.67 v25.65,26.67
LCD_Y-  (via drill 0.33)
  Top 0.203: U1.54 37.41,46.41 v36.58,47.24 | v29.21,25.4 30.43,25.4 U$10.P39
  Bottom 0.203: v36.58,47.24 36.32,46.99 36.32,39.37 29.21,32.26 v29.21,25.4
N$1  (via drill 0.33)
  Top 0.61: v19.05,16.26 D10.C
  Bottom 0.61: CARD1.P4 17.02,7.62 16.26,8.38 16.26,14.99 17.53,16.26 v19.05,16.26
N$2
  Top 0.61: U$2.P2 85.34,35.56 | 85.34,35.56 88.9,39.12 92.21,39.12 U$2.GND2 | U$2.GND1 91.64,29.26 85.34,35.56 | D6.A D7.C
  Top 1.016: D7.C 78.9,32.51 U$2.P2
N$3
  Top 1.016: F1.P$1 88.14,27.18 85.09,30.23 82.08,30.23 U$2.P1
N$4
  Top 0.203: R10.2 20.57,36.58 24.64,40.64 28.45,40.64 29.14,39.95 U$10.P10
N$5  (via drill 0.33)
  Top 0.203: X3.2 19.85,52.62 v19.56,52.32 | v11.18,35.56 11.18,34.51 U5.1
  Bottom 0.203: v19.56,52.32 18.8,51.56 16.51,51.56 11.18,46.23 v11.18,35.56
N$6  (via drill 0.33)
  Top 0.203: X3.3 19.05,53.09 v18.29,52.32 | v11.18,30.99 11.18,32.55 U5.3
  Bottom 0.203: v18.29,52.32 16.51,52.32 10.16,45.97 10.16,32 v11.18,30.99
N$7
  Top 0.61: D8.C D5.A
  Top 1.016: F1.P$2 D8.C
N$8
  Top 0.203: U$10.P3 20.46,43.45 R12.2
N$9  (via drill 0.33)
  Top 0.61: v19.05,18.54 D3.C
  Bottom 0.61: CARD0.P4 56.64,3.3 9.4,3.3 7.62,5.08 7.62,16.76 9.4,18.54 v19.05,18.54
N$10
  Top 0.203: U$10.P7 U$10.P6 30.48,42.16 | 30.48,42.16 U$10.P5 | U$10.P5 U$10.P4 | U$10.P5 29.75,42.45 30.48,42.16
  Top 0.61: 30.48,42.16 22.18,42.16 U4.3
N$11
  Top 0.203: L1.2 57,45.91 U1.21 U1.22
N$12
  Top 0.203: U1.49 41.49,52.05 C19.1
N$13
  Top 0.61: R13.2 R14.2 16.88,41.65 U4.1
N$14
  Top 0.203: U1.73 37.51,36.91 37.08,37.34 C20.1
N$15  (via drill 0.33)
  Top 0.203: v8.56,5.69 8.56,8.12 D1.C
  Bottom 0.61: CARD0.P1 CARD0.P2 59.69,7.62 56.39,4.32 9.93,4.32 v8.56,5.69
N$16
  Top 0.203: U3.5 49.06,11.47 48.26,10.67 48.26,9.16 U7.P$2
N$17
  Top 0.203: U3.8 48.98,13.42 46.99,11.43 U7.P$1
N$18
  Top 0.203: C21.1 45.58,14.11 46.23,13.46 46.23,13.11 45.9,12.78 45.59,12.78 U3.2 U3.3
N$19
  Top 0.203: R17.2 45.47,16.26 43.43,14.22 43.43,11.91 43.87,11.48 44.31,11.48 U3.4
N$20
  Top 0.203: C22.2 R17.1
N$21
  Top 0.61: D4.C CARD1.P1 CARD1.P2
N$22  (via drill 0.33)
  Top 0.203: 8.38,3.81 6.35,5.84 6.35,15.24 7.62,16.76 D2.C
  Top 0.61: v10.16,16.76 D2.C
  Bottom 0.61: CARD0.P3 60.96,12.19 60.45,12.7 58.93,12.7 58.17,11.94 58.17,7.37 56.13,5.33 10.41,5.33 9.4,6.35 9.4,16.76 v10.16,16.76
N$24
  Top 0.61: D11.A 68.83,29.97 68.33,29.46 68.33,25.91 79.5,14.73 79.5,5.84 77.72,4.06 64.26,4.06 62.23,6.1 CARD0.P6 CARD0.P7
N$25
  Top 0.61: CARD1.P3 19.05,12.45 17.02,14.48 D9.C
N$26
  Top 0.406: X3.1 20.65,51.64 19.81,50.8 12.19,50.8 8.13,46.74 8.13,19.2 D13.A
N$28
  Top 0.61: D12.A 69.5,26.01 80.52,14.99 80.52,5.59 77.98,3.05 23.62,3.05 20.32,6.35 CARD1.P6 CARD1.P7
NJTRST  (via drill 0.33)
  Top 0.203: U$1.4 48.51,28.7 v48.01,29.21 | U1.90 48.01,33.93 48.01,35.56 v48.26,35.81
  Bottom 0.203: v48.01,29.21 48.01,35.56 v48.26,35.81
NRST  (via drill 0.33)
  Top 0.203: U$1.7 v51.05,25.15 | v49.28,42.16 49.53,42.42 U1.14 56.13,42.41 v57.91,42.67 57.66,42.67 | SW2.P$2 91.93,48.77 89.41,48.77 86.47,45.83 C1.1 R1.1 84.84,42.56 v84.84,43.69
  Bottom 0.203: v49.28,42.16 49.28,41.91 54.86,36.32 54.86,26.67 53.34,25.15 v51.05,25.15 | v57.91,42.67 75.69,42.67 81.03,37.34 83.57,37.34 84.84,38.61 v84.84,43.69
OSC32_IN
  Top 0.203: C15.1 59.55,36.69 X2.P$2 59.69,37.34 59.18,37.34 57.11,39.41 U1.8
OSC32_OUT
  Top 0.203: C14.1 63.39,36.94 X2.P$1 61.72,38.61 58.67,38.61 57.37,39.91 U1.9
OSC_IN
  Top 0.203: U1.12 60.01,41.41 X1.3 61.46,41.78 C17.1
OSC_OUT
  Top 0.203: U1.13 58.67,41.91 59.69,42.93 63.44,42.93 X1.1 64.84,44.16 C16.1
PWR_BAT  (via drill 0.33)
  Top 0.203: U1.46 42.99,47.82 v41.4,46.23
  Bottom 0.203: v41.4,46.23 42.67,44.96 42.67,40.39 33.02,30.73 33.02,16.26 31.5,14.73 31.5,11.18 30.73,10.41 30.73,9.91 31.5,9.14 31.5,8.64 30.73,7.87 30.73,6.1 | 30.73,6.1 30.73,5.84 23.37,5.84 CARD1.P8 | CARD0.P8 63.25,7.87 63.25,9.14 62.48,9.91 62.48,10.41 63.25,11.18 63.25,12.19 61.98,13.46 57.4,13.46 50.04,6.1 30.73,6.1
PWR_CHG  (via drill 0.33)
  Top 0.203: U1.18 56.6,44.41 v58.67,43.43
  Bottom 0.203: U$2.P3 76.46,44.45 59.69,44.45 v58.67,43.43
USB_DM  (via drill 0.33)
  Top 0.203: v15.24,34.54 13.72,34.51 U5.6 | U1.70 38.04,38.41 37.34,39.12 33.53,39.12 v32.77,38.35
  Bottom 0.203: v32.77,38.35 31.75,38.35 30.48,37.08 30.48,36.58 27.18,33.27 17.02,33.27 15.75,34.54 v15.24,34.54
USB_DP  (via drill 0.33)
  Top 0.203: v15.24,32.51 13.72,32.55 U5.4 | U1.71 37.78,37.91 37.08,38.61 34.04,38.61 33.02,37.59 v32,37.59
  Bottom 0.203: v32,37.59 32,37.34 27.18,32.51 v15.24,32.51
VIN
  Top 0.61: 72.75,32.64 D11.C D6.C D5.C D12.C 72.75,24.03 85.85,10.92 85.85,5.84 82.04,2.03 10.25,2.03 D1.A D4.A 3.3,12.28 3.3,18.03 4.32,19.05 D13.C
  Top 0.813: 72.75,32.64 U6.3